# EAGLE board LEDproject.11.7.18 (EAGLE 9.2.0)
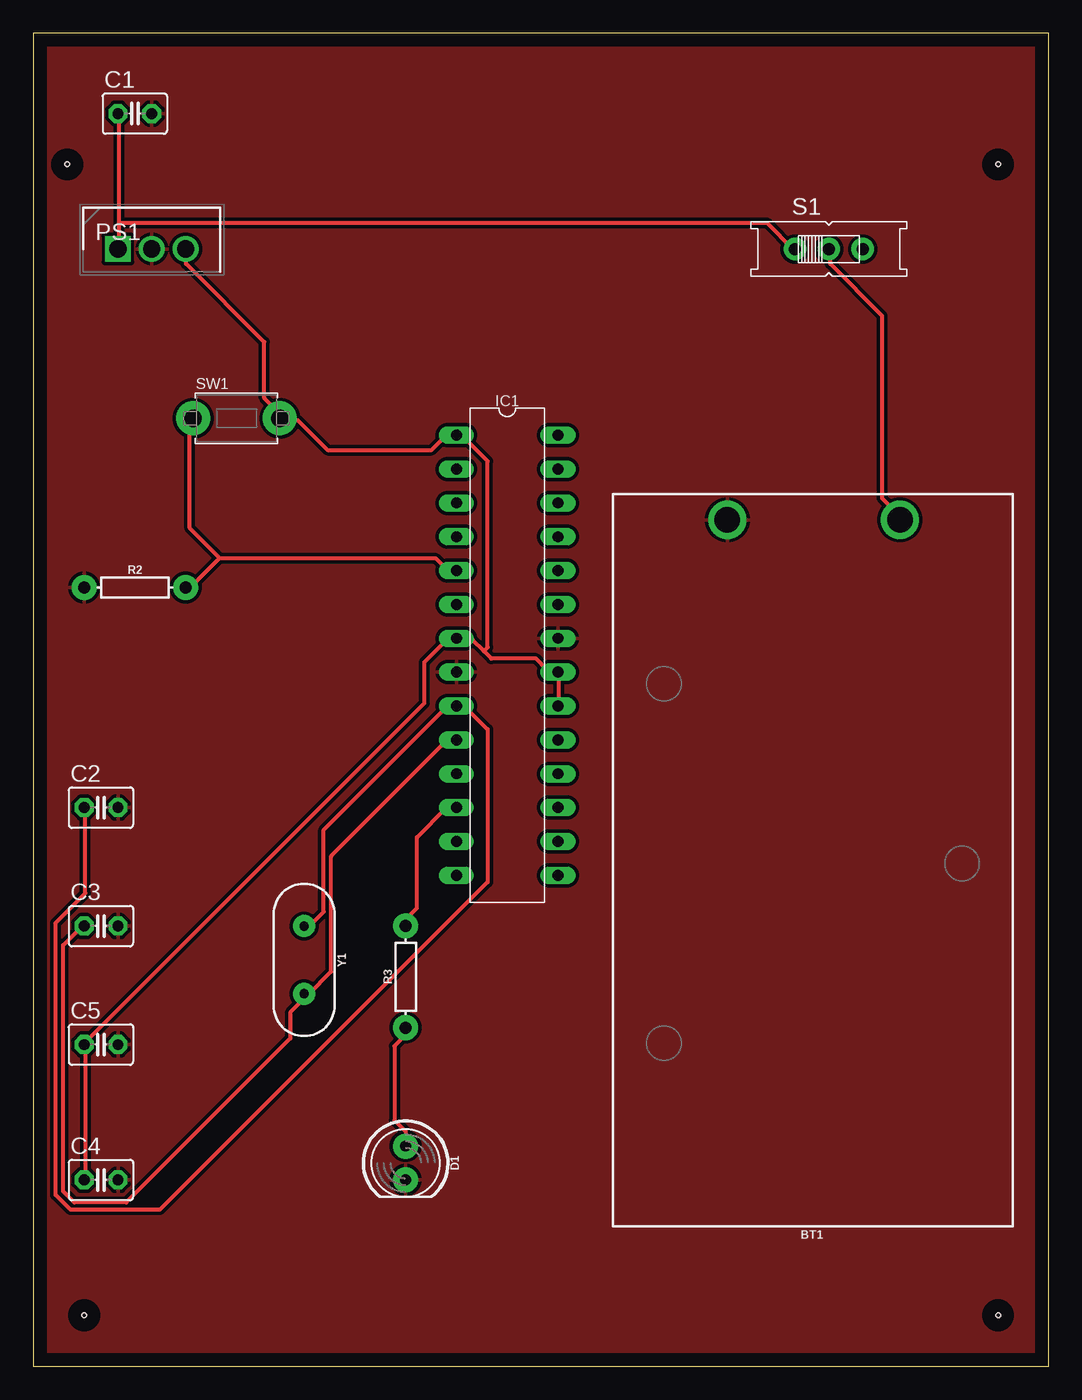
[diagram p0: board, top side]
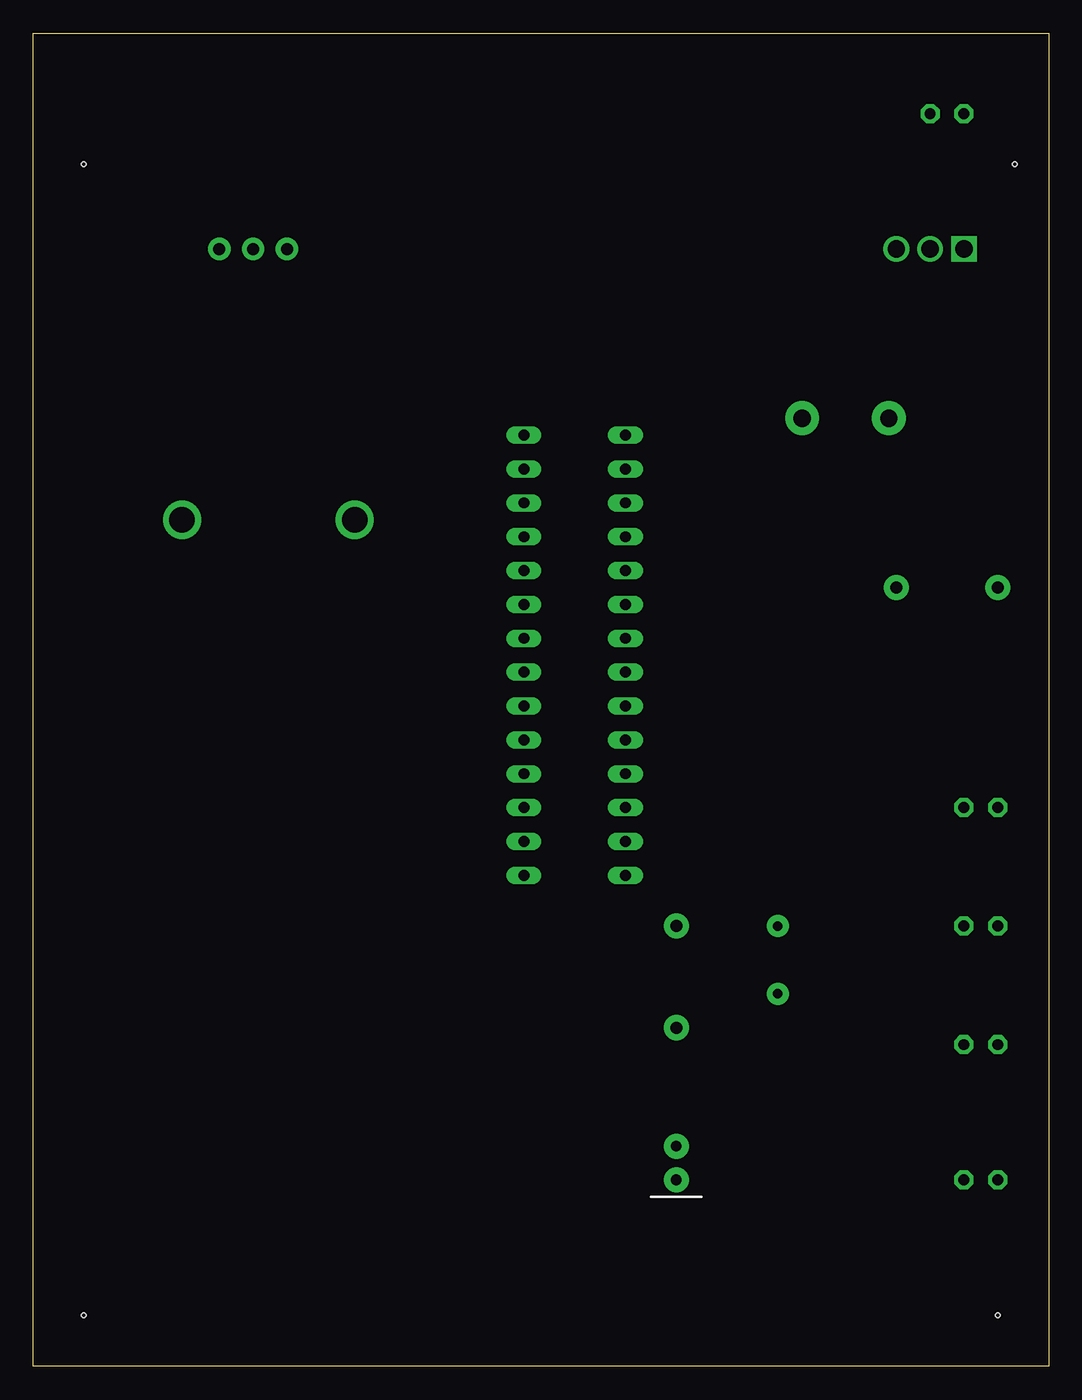
[diagram p1: board, bottom side, seen from below]

Size 76.18 x 100 mm. Coordinates in mm from the lower left corner, seen from the top.
Outline: 0,0 76.18,0 76.18,100 0,100 0,0
Copper layers (1*16): Top 0.035mm / dielectric 1.5mm / Bottom 0.035mm
Design rules "default": minimum track width 6mil, minimum drill 0.35mm, track to track 6mil, track to pad 6mil, pad to pad 6mil, via to via 6mil, smd to smd 6mil, copper to edge 40mil, drill to drill 6mil, minimum pad ring 10mil, minimum via ring 8mil, stop-mask expansion 4mil, vias tented up to drill 0mil, thermal gap 10mil
Net classes: 0 default: width 0.305 mm, drill 0.508 mm, clearance 0.254 mm
Holes 0.35 mm at 2.54,90.17 72.39,90.17 72.39,3.81 3.81,3.81

## Footprints (pad centres in the part's own frame; a part is rotated, then mirrored left to right if it is on the bottom)
BATTCON_9V = drill 1.905: + 0,0; - 0,-12.954
C025-030X050 = drill 0.813 pad 1.422 octagon: 1 -1.27,0; 2 1.27,0
LED_5MM = drill 0.813 pad 1.88: A -1.27,0; K 1.27,0
DIL28 = drill 0.813 long: 1 -3.81,16.51; 2 -3.81,13.97; 3 -3.81,11.43; 4 -3.81,8.89; 5 -3.81,6.35; 6 -3.81,3.81; 7 -3.81,1.27; 8 -3.81,-1.27; 9 -3.81,-3.81; 10 -3.81,-6.35; 11 -3.81,-8.89; 12 -3.81,-11.43; 13 -3.81,-13.97; 14 -3.81,-16.51; 15 3.81,-16.51; 16 3.81,-13.97; 17 3.81,-11.43; 18 3.81,-8.89; 19 3.81,-6.35; 20 3.81,-3.81; 21 3.81,-1.27; 22 3.81,1.27; 23 3.81,3.81; 24 3.81,6.35; 25 3.81,8.89; 26 3.81,11.43; 27 3.81,13.97; 28 3.81,16.51
TO254P482X997X1968-3P = drill 1.29 pad 1.935 square: 1 0,0 | drill 1.29 pad 1.935: 2 2.54,0; 3 5.08,0
AXIAL-0.3 = drill 0.9 pad 1.88: P$1 -3.81,0; P$2 3.81,0
EG1218 = drill 0.9 pad 1.676: O -2.54,0; P 0,0; S 2.54,0
TACT_PANA-EVQ = drill 1.3 pad 2.54: P$1 -3.25,0; P$2 3.25,0
HC49US = drill 0.7 pad 1.651: 1 -2.54,0; 2 2.54,0

## Placement (x,y rotation side)
BT1  [BATTCON_9V]  52.07,63.5 90 top
C1  [C025-030X050]  7.62,93.98 0 top
C2  22pF  [C025-030X050]  5.08,41.91 0 top
C3  22pF  [C025-030X050]  5.08,33.02 0 top
C4  .1uF  [C025-030X050]  5.08,13.97 0 top
C5  .1 uF  [C025-030X050]  5.08,24.13 0 top
D1  Blue  [LED_5MM]  27.94,15.24 270 top
IC1  ATMEGA328-PU  [DIL28]  35.56,53.34 0 top
PS1  MC7805CT  [TO254P482X997X1968-3P]  6.35,83.82 0 top
R2  10k  [AXIAL-0.3]  7.62,58.42 0 top
R3  100 Ohm  [AXIAL-0.3]  27.94,29.21 90 top
S1  [EG1218]  59.69,83.82 0 top
SW1  [TACT_PANA-EVQ]  15.24,71.12 0 top
Y1  16MHz  [HC49US]  20.32,30.48 270 top

## Library data of the parts
BT1 = SparkFun-Batteries; PROD_ID: BATT-10855
C1 = adafruit; BYPASS1: .33 uF
C2-C5 S1 SW1 = adafruit
D1 = SparkFun-LED
IC1 = ATMEGA328-PU; DESCRIPTION: ATmega Series 20 MHz 32 KB Flash 2 KB SRAM 8-Bit Microcontroller - DIP-28; DIGI-KEY_PART_NUMBER: ATMEGA328-PU-ND; DIGI-KEY_PURCHASE_URL: https://www.digikey.com/product-detail/en/microchip-technology/ATMEGA328-PU/ATMEGA328-PU-ND/2271026?utm_source=snapeda&utm_medium=aggregator&utm_campaign=symbol; MF: Microchip; MP: ATMEGA328-PU; PACKAGE: PDIP-28 Microchip
PS1 = SamacSys_Parts; DESCRIPTION: ON linear voltage regulator,MC7805CT 5V; HEIGHT: 4.82mm; MANUFACTURER_NAME: ON Semiconductor; MANUFACTURER_PART_NUMBER: MC7805CT; MOUSER_PART_NUMBER: 863-MC7805CT
R2 R3 = SparkFun-Resistors; PROD_ID: RES-12183
Y1 = SparkFun-Clocks; PROD_ID: XTAL-08181; SF_ID: COM-00536

## Nets
+5V: C4.1 C5.1 IC1.1 IC1.7 IC1.20 IC1.21 PS1.3 SW1.P$2
GND: BT1.+ C1.2 C2.2 C3.2 C4.2 C5.2 D1.K IC1.8 IC1.22 PS1.2 R2.P$1
N$1: C2.1 IC1.9 Y1.1
N$2: C3.1 IC1.10 Y1.2
N$3: BT1.- S1.P
N$5: C1.1 PS1.1 S1.O
N$6: IC1.5 R2.P$2 SW1.P$1
N$7: IC1.12 R3.P$2
N$8: D1.A R3.P$1

## Tracks (layer width: path | path; a pad name or v marks a point on that pad's centre or on a via)
+5V
  Top 0.305: PS1.3 11.46,83.82 11.46,82.7 17.32,76.83 17.32,72.64 18.72,71.25 SW1.P$2 18.72,70.97 19.84,70.97 22.07,68.73 29.9,68.73 31.01,69.85 IC1.1 32.13,69.85 34.09,67.89 34.09,53.92 33.81,53.65 | C4.1 3.91,13.97 3.91,24.03 C5.1 3.91,24.31 29.34,49.73 29.34,52.81 31.01,54.48 31.57,54.48 IC1.7 31.85,54.48 32.97,54.48 33.81,53.65 | 33.81,53.65 34.37,53.09 37.72,53.09 38.56,52.25 39.12,52.25 IC1.21 39.4,51.97 39.4,49.73 IC1.20
GND
  pour Top: 0,101.6 77.47,101.6 77.47,0 -1.27,0 -2.54,-1.27 -2.54,99.06
N$1
  Top 0.305: Y1.1 20.4,33.25 20.95,33.25 21.79,34.09 21.79,40.23 31.01,49.45 31.57,49.45 IC1.9 31.85,49.45 32.41,49.45 34.09,47.78 34.09,36.32 9.5,11.73 2.79,11.73 1.68,12.85 1.68,33.25 3.91,35.48 3.91,41.91 C2.1
N$2
  Top 0.305: 20.68,27.94 22.35,29.62 22.35,38.28 31.01,46.94 31.57,46.94 IC1.10 | 20.68,27.94 Y1.2 20.4,27.94 | 20.68,27.94 19.28,26.54 19.28,24.59 6.99,12.29 3.07,12.29 2.23,13.13 2.23,31.57 3.63,32.97 C3.1
N$3
  Top 0.305: S1.P 59.79,83.82 59.79,82.7 63.7,78.79 63.7,65.1 65.1,63.7 BT1.-
N$5
  Top 0.305: 6.43,85.78 6.43,83.82 PS1.1 | 6.43,85.78 6.43,93.88 C1.1 | 6.43,85.78 55.04,85.78 57,83.82 S1.O
N$6
  Top 0.305: 13.97,60.63 30.18,60.63 31.01,59.79 31.57,59.79 IC1.5 | 13.97,60.63 12.01,58.67 11.46,58.67 R2.P$2 | 13.97,60.63 11.73,62.87 11.73,70.97 SW1.P$1
N$7
  Top 0.305: IC1.12 31.01,41.91 28.78,39.67 28.78,34.37 27.94,33.53 R3.P$2
N$8
  Top 0.305: D1.A 27.94,17.6 27.1,18.44 27.1,24.03 27.94,24.87 R3.P$1